# Altium PCB Pulser Driver.PcbDoc (part 2 of 3)
Units mil, origin at the board's own origin, x right, y up, seen from the top; angles counter-clockwise.
Board outline 1200 x 10020 mil, 6 copper layers (TopLayer, Ground, MidLayer1, MidLayer2, Power, BottomLayer); 260 components, 152 nets, 836 pads, 245 vias.
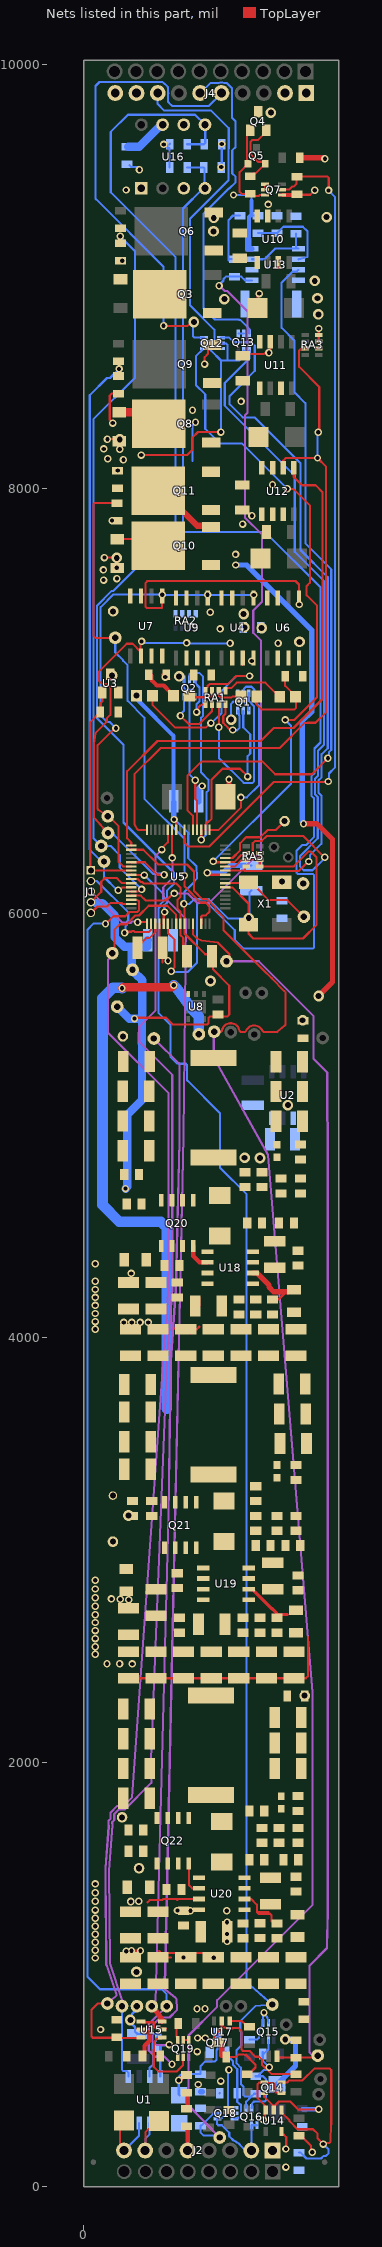
[diagram p6: the nets of this part, all layers, seen from the top]

## Via types
v1: diameter 35, hole 20, TopLayer to BottomLayer, 210 vias
v2: diameter 50, hole 28, TopLayer to BottomLayer, 35 vias

## Nets (pads, with @x,y where several pads share a name; then routed paths per layer and width w, separated by ;. In a path a pad name is that pad's centre, name@x,y a point inside that pad or via, vN(x,y) a via of type N, cw(c..) or ccw(c..) an arc to the next point about the centre after c; other vN are vias at no path point) (continued)
3: C19.1 J4.9 Q10.3 Q11.2 R10.1 U12.6 | length 345.9
  TopLayer w10: R10.1@158,8085.68 158.32,8086 v1(160,8086) R10.1@165,8081 ; Q11.2@350.97,7990.76 Q11.2@350.97,8004.71
  TopLayer w30: Q11.2@350.97,7990.76 450.14,7891.59 468.41,7891.59 533.95,7826.05 Q10.3@593.48,7826.05
  BottomLayer w10: J4.9@233,9860 J4.9@245,9860
3H: U5.1 U12.1 | length 2602.5
  TopLayer w10: U5.1@223.31,6319.17 223.31,6333.69 204,6353 204,6669.07 346.93,6812 833,6812 894,6873 988,6873 1124.5,7009.5 1124.5,7984.5 1092,8017 1028,8017 989,8056 U12.1@989,8099
3L: RA3.3 U5.64 U12.2 | length 3333
  TopLayer w10: U5.64@297.21,6393.07 296.89,6393.07 255.52,6393.07 252.59,6396 251.84,6396.75 238,6418.21 238,6654.99 361.01,6778 922,6778 1041,6897 1052.46,6897 1052.96,6897.5 1091.5,6897.5 1141.5,6947.5 1141.5,8104.81 v1(1101,8145.31) 951.31,8145.31 939,8133 U12.2@939,8099 ; RA3.3@1044,8662.5 1039.16,8657.66 1020.14,8657.66 1014.28,8651.8 1014.28,8574.73 1109.35,8479.66 1109.35,8271.35 v1(1105,8267)
  BottomLayer w10: v1(1101,8145.31) 1101,8263 v1(1105,8267)
3V3: 1.1 C1.1 C4.2 C5.2 C6.2 C7.2 C8.2 C9.2 C10.2 C12.2 C13.2 C14.2 D3.1 D4.1 D5.1 D6.1 J1.4 pad.28 pad.45 Q12.2 Q12.5 Q13.5 Q15.5 Q16.5 R1.2 R17.2 R22.1 R24.2 R26.1 R45.2 R74.2 R75.1 RA2.1 RA2.3 RA2.5 RA2.7 RA5.3 RA5.5 RA5.7 U1.3 U3.2 U4.3 U4.7 U4.8 U5.10 U5.19 U5.26 U5.38 U5.57 U6.3 U6.7 U6.8 U7.3 U7.7 U7.8 U9.3 U9.7 U9.8 U13.8 U15.1 U15.5 U17.1 U17.5 X1.4 | length 9890.7
  TopLayer w10: J1.4@33,6052 82,6101 82,6148.42 99.58,6166 154.51,6166 172.15,6148.36 172.15,6147.87 178.01,6142.01 U5.10@223.31,6142.01 ; U3.2@161.4,7040.39 U3.2@163.02,7042 ; D6.1@231.2,7042 D6.1@248.2,7025 ; v1(238.72,5503.62) 242.61,5507.5 387.5,5507.5 419.96,5475.04 580.13,5475.04 587.15,5482.07 587.15,5507.14 593.01,5513 633.09,5513 675,5513 685,5523 685,5659 609.29,5734.71 609.29,5791.76 C5.2@604.06,5797 594.33,5806.72 572.28,5806.72 474.37,5904.63 U5.26@474.37,5950 474.06,5950.32 474.06,6042.43 v1(471.49,6044.99) ; pad.28@250,850 pad.28@257,843 ; C6.2@252.94,5838 261,5838 264,5835 264,5853.11 294,5883.11 308.11,5883.11 336.26,5911.26 336.26,5930.31 336.58,5930.63 U5.19@336.58,5950 ; U15.1@270,777.4 273.31,774.09 330,774.09 333,771.09 333,758.5 ; v1(270,8159) 486,8159 510,8183 510,8240 538,8268 645.28,8268 v1(645.78,8267.5) ; C13.2@319,7101 323,7097 ; 333,751 340.6,743.4 U15.5@369.41,743.4 ; U15.5@369.41,740 374.25,744.84 U15.5@386.84,744.84 ; v1(425,6442) 425,6435.24 434.68,6425.55 434.68,6393.39 U5.57@435,6393.07 ; U17.1@612.6,683.16 612.6,708.85 649.75,746 650,746.25 U17.5@650,779.41 ; 650,750 668.84,750 672.59,746.25 702.22,746.25 703.97,748 727,748 742,733 742,678 742.41,677.59 742.41,646.62 750.03,639 781,639 808,612 826,612 840,598 840,573.03 859.03,554 v1@864,554 ; U5.38@666.38,6122.32 666.69,6122.01 699.99,6122.01 776,6046 776,5946.27 775.62,5945.9 775.62,5904.38 799,5881 1032.4,5881 1097,5945.6 1097,6263 1068.12,6291.88 1059.84,6291.88 988.97,6221.01 RA5.7@829,6221.01 RA5.5@829,6252.5 RA5.3@829,6284 ; U4.3@749,7170 U4.3@749,7203 ; D4.1@814.8,7021 814.8,6983.2 837,6961 993.14,6961 999,6966.86 999,7018.8 D3.1@997.8,7020 997.8,7021.97 948.32,7071.45 C12.2@948.32,7117 ; v1@863,553 863,552 885,530 R22.1@1000,530 ; C12.2@946,7117 C12.2@947.16,7115.84
  TopLayer w20: v2(248,7026) D6.1@248.6,7026.6 ; D6.1@248.6,7031.6 D6.1@248.6,7026.6 ; D6.1@250,7028 D6.1@248.6,7026.6 ; C13.2@318.5,7119.28 318.5,7098.5 344,7073 376.28,7073 406.72,7042.56 407.61,7042.56 423.2,7026.97 D5.1@423.2,7025
  MidLayer1 w10: pad.45@169.89,5571.97 169.89,5567.85 172.6,5564.96 pad.45@157,5560 180.94,5555.77 180.01,5554.85 pad.45@179.04,5553.88 ; pad.28@241.28,855.86 247.14,850 pad.28@250,850
  BottomLayer w10: J1.4@33,6052 37.75,6047.25 57.75,6047.25 ; v2(248,7026) 248,7015.18 258.78,7004.39 258.78,7000.22 ; pad.28@250,850 240.65,840.65 240.65,827.12 226.65,813.12 226.65,792.65 v2(219,785) 219,774.18 241,752.18 241,731 252.94,719.06 350.94,719.06 360,710 352,710 340,698 340,688 333,681 330.03,681 323,673.97 323,628.03 327,624.03 327,575.19 318.12,566.31 316.31,566.31 310,560 U1.3@310,519 ; v1(425,6442) 429,6442 492,6379 492,6260 528.15,6223.85 530.84,6221.16 533.77,6170.16 533.77,6165.73 521.49,6153.44 521.49,6148.49 474.37,6101.37 474.37,6047.87 v1(471.49,6044.99) 471.98,6044.5 497.94,6044.5 519.44,6066 588.76,6066 679.76,5975 775,5975 v2(777,5977) ; Q12.2@565.29,8687 588,8687 598,8677 598,8653 646,8605 ; v1(645.78,8267.5) 646,8267.72 646,8605 ; Q12.5@646,8687 648.65,8684.35 671.14,8684.35 677,8678.5 677,8606 678,8605 ; Q13.5@753.59,8651 753.59,8627.59 731,8605 678,8605 ; v2@780,5990 780,6097.89 C7.2@789,6106.89 ; Q16.5@790,370 792.87,372.87 792.87,391.87 801.7,400.7 852.14,400.7 858,406.56 858,506 844,520 R26.1@826,520 ; R26.1@810,520 R26.1@826,520 ; R24.2@843,632.87 R24.2@843,625 843,593 v1(874,562) ; R24.2@845.06,622.94 870,647.87 Q15.5@870,690 ; 859.22,549.22 847.09,549.22 826,528.13 R26.1@826,520 ; 646,8605 678,8605
  BottomLayer w20: 258.78,7000.22 422.94,6836.06 C8.2@422.94,6524
  BottomLayer w25: C8.2@422.94,6524 423.97,6522.97 423.97,6443.03 v1(425,6442)
  BottomLayer w40: 57.75,6047.25 87.75,6047.25 146.5,5988.5 146.5,5886.5 191,5842 225,5842 ; pad.45@157,5560 213.17,5503.83 238.72,5503.83 274,5503.83 274,5434.61 273,5433.61 273,5386.39 274,5385.39 274,5120.03 204,5050.03 204,4710.38 v1(196.33,4702.71) ; v1(238.72,5503.62) v1@238.93,5503.83 ; 276,5519.5 276,5684.43 264.28,5696.14 256.4,5704.03 254.64,5704.25 243.18,5715.71 pad.28@229,5734 225.17,5737.83 225.17,5751.97 225,5752.14 225,5842 ; C4.2@299.31,5842 289,5842 225,5842 ; C4.2@299.31,5844.64 299.31,5870.36 C4.2@301.94,5873
  other v1: 536,700 572,700 596,7418 199,9408
  other v2: 248,1012 756,7347 753,7410 1088,8980
3V3_VDD: C26.2 C27.2 C28.2 C29.2 C30.2 C31.2 C32.2 C33.2 C34.2 C35.1 C36.1 C48.2 C49.2 C50.2 C51.2 C52.2 C53.2 C54.2 C55.2 C56.2 C57.1 C58.1 C70.2 C71.2 C72.2 C73.2 C74.2 C75.2 C76.2 C77.2 C78.2 C79.1 C80.1 F2.2 F3.2 J2.1 J4.1 R42.2 R52.2 R62.2 Rs1.2 Rs2.2 Rs3.2 U18.8 U19.8 U20.8 | length 730.9
  TopLayer w10: v1(97.02,7676.09) v2@152,7676.09 ; v1(111.02,8234.09) F2.2@166,8234.09 ; C34.2@201,4260 C34.2@210,4260 ; C71.2@220,1080 247.5,1080 224.53,1102.97 v1(224.53,1110.88) ; v1@226.18,1111 v1@251.68,1111 ; v1(267,1111) v1@266.75,1110.75 ; C72.2@350,1080 410,1080 ; 355,1110 365,1100 590,1100 C74.2@610,1080 ; 428,4044 C29.2@480,4040 492,4040 C29.2@500,4040 ; C29.2@500,4020 C29.2@500,4040 ; 545,4053 532,4040 C29.2@500,4040 ; C35.1@545,4150 C35.1@545,4189 ; v1@266.75,1110.75 270,1107.5 v1@266.75,1110.75
  other v1: 533,838 571,838 53.5,1077 612,1078 469,1080 200.04,1109.34 53.5,1113 53.5,1151 675,1155 53.5,1189 674,1190 53.5,1227 675,1246 53.5,1264 502,1300 673,1300 441,1301 53.5,1303 221.48,1341.67 53.5,1344 221.62,1343.67 259,1345 53.5,1385 53.5,1426 227.5,2463 109,2464 168.5,2464 53.5,2508 53.5,2544 53.5,2582 53.5,2620 53.5,2658 53.5,2695 53.5,2734 212,2765 171,2767 130,2769 53.5,2775 53.5,2816 53.5,2857 53.5,4040 188,4072 226,4072 265,4072 304,4072 53.5,4076 53.5,4114 53.5,4152 53.5,4190 53.5,4227 53.5,4266 223,4303 53.5,4348 93,7570 156,7577 92,7618 155.02,7628.09 186.5,8137 112.02,8142.09 169.02,8186.09 94,8188
  other v2: 155,7675 169,8233
3V3FB: C42.1 R46.1 R48.2 R49.1 R51.2 U18.4
3V3GDRV: Q20.4 U18.6 | length 127.9
  TopLayer w21: Q20.4@515,4432.75 515,4385 545,4355 U18.6@582.75,4355
3V3GND: 2.1 C26.1 C27.1 C28.1 C29.1 C30.1 C31.1 C32.1 C33.1 C34.1 C36.2 C37.1 C38.1 C41.2 C43.1 C44.1 C45.1 C46.1 C98.1 C99.1 C100.1 D12.A R15.1 R44.1 R47.1 R51.1 U18.5
3V3ISNS: C35.2 R43.1 U18.7
3V3OutPSU: C41.1 C43.2 C44.2 C45.2 C46.2 C47.1 C98.2 C99.2 C100.2 L1.2 R45.1 R50.1
3V3RC: C37.2 R42.1 U18.1
5V: 3.1 C2.2 C23.2 pad.35 Q4.3 Q17.2 R19.1 R20.1 R32.1 R55.2 U2.2 U14.5 U15.6 U16.6 U16.7 | length 5015.2
  TopLayer w10: U16.6@468.17,9718.83 U16.6@471,9716 ; U14.5@932.24,249.03 936.84,244.43 942,244.43 953.5,232.93 953.5,172.5 952,174 v1(952,177)
  TopLayer w25: pad.35@320,850 322.74,849.5 327.32,844.92 328.91,843.34 364.95,791.44 369.41,785.01 369.42,777.48 U15.6@369.41,777.4
  MidLayer1 w10: pad.35@320,850 334.06,863.32 334.16,863.41 337.07,866.33 399,3160.7 409.39,3889.73 433.29,4223.13 451.28,4927.12 451.28,5288.72 pad.35@330,5410
  BottomLayer w10: R32.1@640,440 R32.1@641.5,441.5
  BottomLayer w40: C23.2@208.59,9611 260.59,9611 365.59,9716 v1(371,9716)
  other v1: 952,92 644.5,497 534,636
  other v2: 210.12,3162 830,4847 758,4848 881,9773
5V-MEAS: Q19.2 U15.4 | length 362.5
  TopLayer w10: U15.4@369.41,702.6 364.57,697.76 345.76,697.76 331,683 331,648.28 329.28,646.56 329.28,564.72 351,543 439,543 467,571 467,608.29 Q19.2@468,609.29
5V-Q-EN: Q14.3 R19.2 U14.1 | length 1130.1
  TopLayer w10: Q14.3@930.71,491.18 959.54,491.18 968.64,500.28 1030.56,500.28 1086.28,556 1159.14,556 1166,549.14 1166,293.13 1165,292.13 1164.89,288.88 1162.57,217.67 1162.25,210.64 1156.39,204.78 1152.47,204.78 1132.78,204.78 v1(1128,200) 1101.59,226.41 1101.59,248.41 1079.96,270.04 1006.68,270.04 969.39,307.33 969.39,311.29 U14.1@932.08,348.6
  BottomLayer w10: R19.2@1013.87,160 1021.75,160 1049.25,132.5 1117.57,132.5 1129.75,144.68 1141.32,144.68 1153.5,156.86 1153.5,174.5 v1(1128,200)
5V-Q-TX: Q14.6 U14.2 | length 395.1
  TopLayer w10: Q14.6@850,440 850.02,422.98 U14.2@894.6,378.4 ; U14.2@895.84,377.16 919.68,401 971.96,401 1008.96,364 v1(1107,364)
  BottomLayer w10: 1029,365.68 1030.68,364
  BottomLayer w20: 1030.68,364 v1(1107,364)
5vFB: C64.1 R56.1 R58.2 R59.1 R61.2 U19.4
5VGDRV: Q21.4 U19.6
5VGND: 4.1 C48.1 C49.1 C50.1 C51.1 C52.1 C53.1 C54.1 C55.1 C56.1 C58.2 C59.1 C60.1 C63.2 C65.1 C66.1 C67.1 C68.1 C95.1 C96.1 C97.1 D13.A R14.1 R54.1 R57.1 R61.1 U19.5 | length 1044.1
  TopLayer w10: C48.1@210,2395 C49.1@340,2395 C50.1@470,2395 C51.1@600,2395 C52.1@730,2395 C53.1@860,2395 C54.1@990,2395 1022,2395 1046,2395 1056,2405 1056,2429 1056,2589 ; C59.1@820,2610 C59.1@830,2610
5VISNS: C57.2 R53.1 U19.7
5VOutPSU: C63.1 C65.2 C66.2 C67.2 C68.2 C69.1 C95.2 C96.2 C97.2 L2.2 R55.1 R60.1
5VRC: C59.2 R52.1 U19.1
12V: 5.1 C16.2 C18.2 C20.2 D7.1 D8.1 D9.1 pad.42 R65.2 U10.5 U11.5 U12.5 | length 5450.6
  TopLayer w10: D7.1@818,8852 818,8912 v1(826,8920) ; v2@1103.49,5612.51 v2(1106,5610)
  TopLayer w15: pad.42@542,5419.7 pad.42@542,5430
  TopLayer w25: v1(1035,6422) 1099,6422 1172,6349 1172,5676 1108.51,5612.51 v2@1103.49,5612.51
  TopLayer w40: v1(179.77,5647.23) 183.54,5651 414.68,5651 v1(424,5660.32)
  BottomLayer w10: 512.5,8131 512.5,8300.5 v1(526,8314) ; v1(741,8412) v1@745.78,8416.78 ; v1(826,8920) v1@833.24,8912.76
  BottomLayer w25: v1(716,7641) 767,7641 1073.5,7334.5 1073.5,6949.27 1029,6904.77 1029,6430.71 1035,6424.71 v1(1035,6422)
  BottomLayer w50: v1(179.77,5647.23) 178.71,5648.29 137.29,5648.29 88,5599 88,4626 167,4547 361.71,4547 391,4517.71 391,3666.5 ; v1(424,5660.32) 438.19,5646.13 512.71,5543.79 542,5514.5 pad.42@542,5430
  other v1: 715,7691 747.78,7833.78 792,7873 512,8370
12VFB: C86.1 R66.1 R68.2 R69.1 R71.2 U20.4
12VGDRV: Q22.4 U20.6 | length 156.1
  TopLayer w10: Q22.4@495,1522.75 495,1421 511,1405 U20.6@542.75,1405
12VGND: 6.1 C70.1 C71.1 C72.1 C73.1 C74.1 C75.1 C76.1 C77.1 C78.1 C80.2 C81.1 C82.1 C85.2 C87.1 C88.1 C89.1 C90.1 C92.1 C93.1 C94.1 D14.A R16.1 R64.1 R67.1 R71.1 U20.5
12VISNS: C79.2 R63.1 U20.7 | length 256
  TopLayer w10: 300,1340 310,1350 370,1350 375,1355 445,1355 ; 440,1350 445,1355 ; U20.7@542.75,1355 445,1355
12VOutPSU: C85.1 C87.2 C88.2 C89.2 C90.2 C91.1 C92.2 C93.2 C94.2 L3.2 R65.1 R70.1
12VRC: C81.2 R62.1 U20.1
AX: C25.2 R38.1 U5.21 U16.5 | length 4858.7
  TopLayer w10: U5.21@375.95,5950 376.26,5950.32 376.26,6001.76 v1(380.5,6006)
  BottomLayer w10: v1(380.5,6006) 379.04,6007.46 379.04,6037.5 391,6049.46 391,6105.72 425,6139.72 425,6190 187,6428 187,6794.28 62,6919.28 62,7449.04 131.96,7519 139.72,7519 431,7810.28 431,9093 127,9397 127,9682 208,9763 524,9763 572,9715 572,9629 R38.1@567,9624 C25.2@487,9624
AY: C24.2 R37.1 U5.22 U16.4 | length 5773
  TopLayer w10: U5.22@395.63,5950 395.63,5907.37 428,5875 428,5745.18 412.23,5729.41 v1(412.23,5726.82)
  BottomLayer w10: v1(412.23,5726.82) 416.05,5723 489,5723 533,5767 533,6043.14 538.86,6049 581.72,6049 710.84,5919.88 710.84,5875.31 753,5833.16 1079.3,5833.16 1085.16,5839.01 1085.16,6179.64 1079.3,6185.5 1007.86,6185.5 1002,6191.36 1002,6295 1029,6322 1047.28,6322 1085.14,6359.86 1085.14,6541.06 1072,6554.2 1072,6645.55 1086.5,6660.05 1086.5,6776.5 1115,6805 1115,7536.42 855.42,7796 472.86,7796 467,7801.86 467,9321 562,9416 U16.4@571,9416 569,9418 569,9509.32 R37.1@564.32,9514 C24.2@487,9514
BAT-M: pad.27 Q19.1 R36.2 U5.14 | length 6145.1
  TopLayer w10: v1(102,5951) 104,5951 139,5986 195,5986 215,6006 235.24,6006 235.82,6006.58 252.96,6006.58 260,6013.62 260,6055.27 252,6063.27 U5.14@223.31,6063.27
  MidLayer1 w10: pad.27@390,850 306,766 306,641 335.24,611.76 380.3,611.76 v1(415.51,576.55)
  BottomLayer w10: v1(102,5951) 45,5951 17,5923 17,989 76,930 367,930 390,907 pad.27@390,850 pad.27@395,850
CANH: D1.2 J2.8 U1.7 | length 324.1
  TopLayer w10: J2.8@171,160 171,296.77 D1.2@191,316.77
  BottomLayer w10: J2.8@190,170 260,240 U1.7@260,300
CANL: D2.2 J2.7 U1.6 | length 324.1
  TopLayer w10: J2.7@290,170 290,256.77 D2.2@360,326.77
  BottomLayer w10: J2.7@290,170 290,226 310,246 U1.6@310,300
CANRX: R1.1 U1.4 U5.58 | length 6144.6
  TopLayer w10: U5.58@415.32,6393.07 415.5,6392.89 415.5,6262.5 v1(417,6261)
  MidLayer1 w10: v1(402,669) 400.5,667.5 341.5,667.5 323,686 323,758.96 360.52,796.48 403.48,796.48 438.34,831.34 438.34,835.75 435.74,884.64 432.66,887.73 432.24,888.06 382.47,928.25 381.33,929.81 381.33,938.09 469.08,4951.37 480.74,5964.56 480.74,5972.85 479.83,5973.76 374,6079.59 374,6122 417,6165 v1(417,6261)
  BottomLayer w10: U1.4@360,519 360,662 362,664 390.24,664 395.24,669 v1(402,669)
CANTX: pad.26 U1.1 U5.59 | length 6123.5
  TopLayer w10: v1(366.94,6300.06) 366.94,6305.94 395.63,6334.63 U5.59@395.63,6393.07
  MidLayer1 w10: pad.26@180,850 180,878.52 122.82,1050.37 122.57,1052.49 122.5,1059.3 118.17,1488.06 118.17,1488.11 cw(c128.17,1488.16) 118.17,1488.16 118.17,1488.54 134.81,1703.88 134.84,1704.27 134.84,1708.8 133.66,1709.97 133.66,1713.49 133.66,1717.64 143,1726.97 143,1755.33 164.67,1777 193.03,1777 318.31,1902.28 318.31,1906.79 314.84,1954.45 314.81,1954.81 314.81,1955.17 392.49,3896.87 416.29,4230.17 416.29,5238.71 261,5394 261,5466 338.19,5543.19 338.19,6271.3 v1(366.94,6300.06)
  BottomLayer w10: pad.26@180,850 179,849 179,550.86 184.86,545 202,545 210,537 U1.1@210,519
CLOCK: pad.46 U5.39 X1.3 | length 440.1
  TopLayer w10: U5.39@666.38,6142.01 771.53,6142.01 X1.3@775.52,6146 788.32,6146 815.8,6118.52 815.8,6117.2 871,6062 959,6062 pad.46@1037,5984
DC-: C16.1 C18.1 C20.1 J4.2 Q6.3 Q9.3 Q11.3 R8.1 R9.2 U10.3 U11.3 U12.3 | length 317.2
  TopLayer w10: v1(569,8588) 569,8620 585,8636 585,8677.76 Q9.3@603.03,8677.76 ; Q11.3@590,8080.53 Q11.3@599,8080.53 ; 787.76,8635 847,8635 v1@865,8653 ; v1(872,8641) 879,8648 U11.3@879,8693 U11.3@879,8708 ; v1(889,8020) v1@889,8035 ; J4.2@945,9856.04 J4.2@945,9860
  BottomLayer w10: v1@568,8587 v1(569,8588) ; v1@887.05,8018.05 v1(889,8020) ; J4.2@945,9844 J4.2@945,9860
  other v1: 868.5,9340.38
  other v2: 1105,8822 1101,8898 611,9213 612,9277 1144,9280
F: pad. pad.30 Q18.2 R34.1 U5.2 | length 7485.5
  TopLayer w10: U5.2@223.31,6299.49 280.51,6299.49 350,6230 486,6230 519,6197 519,6105.57 558.07,6066.5 581.26,6066.5 619.88,6027.88 619.88,6017.88 658.5,5979.26 658.5,5923.78 658.5,5919.64 664.36,5913.78 846.07,5732.98 885.16,5693.88 945.07,5633.07 950.93,5627.21 950.93,5623.07 950.93,5475.93 947.76,5472.76 911.69,5441.41 907.95,5441.41 849.92,5441.41 847.43,5441.41 845.24,5442.57 cw(c849.92,5451.41) 840.92,5447.06 ccw(c803,5429) 764.43,5445.61 760.22,5441.4 756.07,5441.4 742.73,5441.4 738.59,5441.4 735.66,5444.33 733.49,5446.5 ccw(c692,5440) 650.51,5446.5 648.34,5444.33 645.41,5441.4 641.27,5441.4 622.91,5441.4 622.56,5441.4 622.21,5441.43 pad.30@614,5442
  MidLayer1 w10: pad.30@614,5442 612,5440 612,5322.97 612,5320.37 613.26,5318.1 867,4862.33 1077,2328.33 1078.07,1336.36 1078.07,1328.07 628,878 628,846.78 493,711.78 493,382 pad.@640,231
  BottomLayer w10: Q18.2@629.29,345.59 611.34,345.59 553.07,287.32 R34.1@550,287.32 550,254 563,241 pad.@639,241
FLOW: J2.5 R31.2 | length 117.3
  TopLayer w20: J2.5@490,170 R31.2@490,287.32
FP: R30.2 R31.1 | length 80
  TopLayer w20: R31.1@490,370 R30.2@490,450
FP2: D11.2 Q17.3 R30.1 R33.1 | length 497.6
  TopLayer w10: v1(446.95,501.19) v1@450.31,501.19 ; R30.1@478.13,529 R30.1@486,529
  TopLayer w20: v1@450.31,501.19 R30.1@478.13,529
  BottomLayer w10: D11.2@450,430 446.95,433.05 446.95,504.86 451.74,509.65 451.74,522.24 459.49,530 R33.1@550,530 550,542.72 550,568 572,590 617.97,590 625,597.03 625,615.03 625,643 630,648 Q17.3@630,720
GATE-H: Q4.1 Q5.1 Q7.6 R3.1 | length 445.6
  TopLayer w10: Q4.1@784,9690 784,9682 783.87,9682 768,9666.13 768,9561 769.56,9559.44 769.56,9536.88 Q5.1@773.65,9532.8 773.65,9531.3 734,9491.65 734,9400 744,9390 R3.1@784,9390 794,9380 824,9380 828.41,9384.41 Q7.6@854,9384.41
GND: C2.1 C3.1 C4.1 C5.1 C6.1 C7.1 C8.1 C9.1 C10.1 C11.2 C12.1 C13.1 C14.1 C21.1 C22.2 C23.1 C24.1 C25.1 D10.1 D11.1 J1.5 J2.2 J4.10 pad.47 Q1.1 Q1.4 Q2.1 Q2.4 Q7.1 Q14.1 Q14.4 Q15.1 Q15.2 Q16.1 Q16.2 Q18.1 R4.1 R5.2 R7.1 R9.1 R11.1 R13.1 R14.2 R15.2 R16.2 R18.2 R23.2 R25.2 R29.2 R33.2 R34.2 R36.1 R37.2 R38.2 R41.2 R72.2 R73.2 R76.2 RA3.4 RA3.6 RA3.8 U2.4 U3.3 U4.4 U5.9 U5.15 U5.20 U5.25 U5.41 U6.4 U7.4 U8.3 U9.4 U13.4 U14.3 U15.2 U16.1 U16.3 U17.2 X1.2 | length 5427.6
  TopLayer w10: J1.5@33,6002 34,6002 64,6032 109,6032 125,6048 ; 125,6047.89 179,6047.89 183.31,6043.58 U5.15@223.31,6043.58 ; v1(136,8310) 122,8324 122,8439 132,8449 R7.1@164,8449 ; R4.1@172,9074.32 172.68,9075 v1(181,9075) ; U5.9@223.31,6161.69 223.62,6161.38 253.18,6161.38 267.33,6147.23 275.77,6147.23 283,6140 436,6140 455.35,6120.65 455.35,6077.51 441.99,6064.15 441.99,6021.01 454.69,6008.31 454.69,5897.67 468.31,5884.05 468.31,5845.15 485.94,5827.51 485.94,5766.49 C5.1@503.58,5748.85 ; U15.2@253.84,741.58 U15.2@270,740 U15.2@286.32,740 ; R36.1@286.32,617 R36.1@286.32,624.87 ; U5.20@356.26,5950 356.26,5852.8 C6.1@371.06,5838 371.06,5769.08 370.51,5768.54 ; 369,7124 C13.1@389,7124 389,7116.13 401.72,7103.41 C13.1@403.59,7103.41 ; v2@576.35,5688.65 589.35,5688.65 v2(597,5681) ; v1(581.41,6190.93) 585.83,6190.93 595.39,6181.38 U5.41@666.38,6181.38 ; C22.2@670,610 715.81,610 727.81,622 761.62,622 809,574.62 809,561.13 777.87,530 C21.1@770,530 ; R29.2@676.25,362 R29.2@681,362 ; v1(846.13,314) 846.13,320.76 852.35,326.99 852.35,355.16 U14.3@857.2,360 ; Q14.4@850,491.18 828,491.18 819,482.18 819,416 852.6,382.4 U14.3@852.6,360 ; Q14.4@860.83,488.31 891.84,488.31 897.7,482.45 897.7,459.89 897.7,448.73 903.56,442.87 Q14.1@927.83,442.87 ; R72.2@1004,9387.32 1005.32,9386 1067,9386 v1(1088,9407) ; R23.2@1018.87,243.32 1071.22,190.98 1071.22,166.78 v1(1076,162) ; v1(1106.78,8755.5) 1106.78,8725.71 RA3.8@1106.99,8725.5 RA3.6@1106.99,8694 RA3.4@1106.99,8662.5
  TopLayer w20: R36.1@286.32,624.87 286.32,663.87 308.16,685.71 308.16,719.48 298.2,729.44 296.88,729.44 U15.2@286.32,740 ; Q7.1@934.71,9384.41 935.42,9385.13 960.45,9385.13 1001.81,9385.13 R72.2@1004,9387.32
  TopLayer w25: v1(132.5,7850.32) R13.1@157,7850.32 ; 650,618 U17.2@650,680 ; C11.2@667.97,6549 683.97,6565 v1(683.97,6630.56) ; R5.2@1016.68,9560 1129.29,9560 1133.29,9556 v1(1136,9556)
  BottomLayer w10: C23.1@215.5,9526.5 215.5,9524.7 223.59,9516.61 251.39,9516.61 262,9506 v1(262,9504) ; v1(376,9623) 391.61,9623 393.6,9621.01 393.6,9605.4 402.33,9605.4 404.32,9603.41 C24.1@404.32,9514 ; C25.1@404.32,9624 404.32,9624.32 C25.1@406,9626 ; Q2.4@471.87,7101 471.87,7060.13 477,7055 513.05,7055 523.05,7045 Q2.1@523.05,7020.29 ; R33.2@550,438 R33.2@550,447.32 ; v1@551.71,6599.65 v1(557.06,6599.65) ; v1(647,9516) R37.2@647,9514 649.68,9516.68 R38.2@649.68,9624 649.68,9624.68 v1(650,9625) ; v1(683.5,550.93) 679.3,546.72 679.3,352.05 650.12,322.87 632.17,322.87 Q18.1@629.29,320 627.19,317.13 627.19,295.02 633.2,289.01 650.17,289.01 685.23,253.96 685.23,239.41 ccw(c695.04,241.31) 687.91,234.3 705.07,217.15 706.46,216.32 cw(c689,170) 720.85,207.89 720.92,207.84 ccw(c727.21,215.61) 722.05,207.04 722.1,207.01 729.22,202.78 735.08,196.92 756,176 784,176 786.93,173.07 790,170 Q16.2@790,289 ; v2(693.82,6912.53) 693.82,6986.82 705,6998 752.95,6998 774.13,6976.83 774.13,6958.87 Q1.4@777,6956 ; v1(705,9384.5) 705.75,9383.75 786,9383.75 790,9379.75 790,9358 ; Q1.1@725.82,7036.71 Q1.1@728.69,7033.83 ; C7.1@758.49,6225 C7.1@789,6225 ; 766,9205 773,9212 ; 777.59,9277 777.59,9280.59 ; R25.2@780,692.68 816.68,692.68 824.54,700.54 824.54,736.01 841.54,757.01 Q15.1@844.41,770.71 844.92,771.22 844.92,815.95 v1(848.95,819.98) ; 784.68,9287.68 790,9287.68 R18.2@821,9287.68 ; Q16.2@790,289.29 Q16.2@790,289 ; Q16.1@815.59,289.29 815.59,289 Q16.2@790,289 ; v1@850,821 850,812.31 854.44,807.87 860.17,802.14 865.28,794.79 867.01,785.65 867.92,780.81 868.3,778.82 Q15.2@870,770.71
  BottomLayer w20: 777.59,9277 777.59,9247.15 778.41,9246.33 778.41,9180.24 780,9178.65 U13.4@780,9132 ; 777.59,9280.59 784.68,9287.68 ; 790,9287.68 790,9358
  BottomLayer w25: C8.1@541.06,6524 541.06,6589 v1@551.71,6599.65 ; R33.2@550,447.32 R33.2@557.87,447.32 ; v1(581.41,6190.93) 583.32,6189.02 631.37,6189.02 632.39,6188 653.1,6188 690.1,6225 C7.1@758.49,6225 ; R11.1@735,9205 766,9205 ; 773,9212 773,9132 780,9132 U13.4@792,9132 ; D10.1@910,481.1 997,568.1 997,682.5 989.5,690 ; v2(949,694) 971,694 975,690
  other v1: 539,481 79,740 396.51,5776.54 383.02,7113.09 791.5,7188.86 642,7340
  other v2: 1040,2313 961,5096 1031,5496 933,6149 449,7116 133.34,7120.34 1016,7279 838,7344 662,8894
H1#: Q12.4 RA5.8 U5.42 | length 3368.6
  TopLayer w10: U5.42@666.38,6201.06 732.94,6201.06 758.13,6199 ; RA5.8@766.01,6221.01 758.13,6221.01 758.13,6199 ; v1(1060,6244) 1058,6244 1013,6199 758.13,6199
  BottomLayer w10: Q12.4@646,8712.59 684.41,8712.59 706,8691 789,8691 805,8675 805,8555.64 687,8437.64 687,8398 748,8337 804,8337 1021,8120 1021,7712 1149,7584 1149,6777.65 1120.5,6749.15 1120.5,6640.83 1106,6626.33 1106,6568.28 1119.14,6555.14 1119.14,6327.14 1064.78,6272.78 1064.78,6248.78 v1(1060,6244)
H2#: Q13.4 RA5.6 U5.43 | length 3491.5
  TopLayer w10: U5.43@666.38,6220.75 712.75,6220.75 744.5,6252.5 RA5.6@766.01,6252.5 788,6252.5 796,6260.5 796,6330 807,6341 839,6341 862,6364 1033,6364 1133,6264 v1(1135,6264)
  BottomLayer w10: Q13.4@779.18,8651 779.18,8614.18 664,8499 664,8392 994,8062 994,7703.27 1132,7565.27 1132,6795.15 1103.5,6766.65 1103.5,6647.87 1089,6633.37 1089,6561.24 1102.14,6548.1 1102.14,6352.81 1019,6269.67 1019,6219.78 1036.28,6202.5 1077.5,6202.5 1135,6260 v1(1135,6264)
H3#: Q12.1 RA5.4 U5.44 | length 3179.4
  TopLayer w10: v1@617,6248.54 625.11,6240.43 U5.44@666.38,6240.43 666.69,6240.75 708.71,6240.75 742.3,6274.35 748.48,6274.35 758.13,6284 RA5.4@766.01,6284 ; v1(949,6911) 991.23,6911 1099,7018.77 1099,7448.73 1049.5,7498.23 1049.5,7542 1065,7557.5 1065,7922 987,8000 v1(958,8000)
  BottomLayer w10: Q12.1@565.29,8661.41 528,8624.12 528,8489 572,8445 572,8283 641,8214 744,8214 v1(958,8000) ; v1(609.5,6244.44) 976,6610.94 976,6884 v1(949,6911)
HA: Q3.1 U10.7
HALL-1: J4.5 Q12.3 | length 2248.2
  TopLayer w10: v1(375.5,8768) 489.18,8768 509.18,8788 v2@522,8788
  BottomLayer w10: v1(375.5,8768) 375.5,9046.65 57.93,9364.22 55,9367.15 55,9898 74,9917 366.19,9917 369.34,9917 cw(c284.19,9792.47) 390,9900 cw(c347.26,9856.57) 394.82,9894.66 cw(c387,9888.43) 395.01,9894.41 397,9891.77 397,9888.43 397,9872.02 cw(c348,9865) 397,9857.98 397,9823 399.93,9820.07 416,9804 589,9804 J4.5@645,9860 ; v2(518,8786) 514,8782 514,8718.45 519.86,8712.59 Q12.3@565.29,8712.59
HALL-2: J4.6 Q13.3 | length 1583.5
  BottomLayer w10: J4.6@545,9860 598,9913 635.91,9913 cw(c648,9865) 660.09,9913 673,9913 675.93,9910.07 698,9888 698,9748.04 715,9731.04 715,9610.97 699,9594.97 699,9486.03 715,9470.03 715,9445 685,9415 683.03,9415 564,9295.97 564,8852 618,8798 730.38,8798 732.38,8796.01 736.99,8796.01 779.18,8753.82 Q13.3@779.18,8731.71
HALL-3: J4.8 Q12.6 | length 1614
  BottomLayer w10: J4.8@345,9860 347.64,9857.36 347.64,9813.36 379,9782 600,9782 683,9699 683,9603.01 682,9602.01 682,9455 501,9274 501,8864 615,8750 615,8674.45 625.17,8664.28 643.13,8664.28 Q12.6@646,8661.41
HALL-EN: Q7.2 R72.1 U5.55 | length 4008.7
  TopLayer w10: U5.55@474.37,6393.07 474.37,6331.63 492.2,6313.8 589.84,6313.8 893.74,6617.69 1148.69,6617.69 v1(1152,6621) ; Q7.2@934.71,9410 966.4,9410 980.54,9424.14 989.14,9424.14 1002,9437 1002,9468 1005,9471 1148.14,9471 1154,9465.14 1154,9407 v1(1153,9406)
  BottomLayer w10: v1(1152,6621) 1155.5,6624.5 1155.5,6658.5 1183,6686 1183,9376 v1(1153,9406)
HB: Q8.1 U11.7
HC: Q10.1 U12.7
IG: R11.2 R12.1 U13.2 | length 282.8
  BottomLayer w10: 681.34,9075.85 681.34,9266.34 702.68,9287.68 708,9287.68 ; 684,9082.68 R12.1@710,9082.68 ; 705.34,9285.02 708,9287.68 ; R11.2@735,9287.68 708,9287.68
IL-A: R12.2 U5.13 U13.1 | length 3738.9
  TopLayer w10: U5.13@223.31,6082.95 268.05,6082.95 291,6060 387,6060 420.5,6093.5 v1(425.85,6093.5)
  MidLayer1 w10: v1(425.85,6093.5) 488.74,6093.5 491.67,6090.57 526.74,6055.5 532.74,6049.5 591.41,6049.5 834,6292.09 834,7286 798,7322 798,7427 840,7469 840,7783.28 758.5,7864.78 758.5,8345.3 770.5,8357.3 770.5,8837.83 676.55,8931.77 664.8,8931.77 639.58,8957 v1(637,8957)
  BottomLayer w10: v1(637,8957) 637,8960.52 658.22,8981.74 658.22,8988.81 669.41,9000 R12.2@710,9000 742,9000 760,8982 U13.1@792,8982
IP: R8.2 U13.3 U13.5 | length 316
  BottomLayer w10: U13.3@792,9082 851,9082 901,9132 U13.5@1011,9132 1008,9132 1000,9140 R8.2@1000,9202
LA: Q6.1 U10.4
LB: Q9.1 U11.4
LC: Q11.1 U12.4
LED0: Q1.2 U5.49 | length 888.3
  TopLayer w10: U5.49@592.48,6393.07 635.31,6393.07 740,6497.76 v1(740,6546)
  BottomLayer w10: v1(740,6546) 767.94,6546 825,6603.06 825,6976.96 803,6998.96 803,7054.25 789.84,7067.41 764.16,7067.41 754.28,7057.54 754.28,7039.58 Q1.2@751.41,7036.71
LED1: Q1.5 U5.50 | length 787.3
  TopLayer w10: U5.50@572.8,6393.07 573.11,6393.39 573.11,6416.31 575.17,6418.37 575.17,6422.73 582.19,6429.76 586.76,6429.76 602,6445 602,6630 653,6681 736,6681 771.5,6645.5 v1(771.5,6644.06)
  BottomLayer w10: Q1.5@751,6954 751,6876 784,6843 784,6753.16 771.5,6740.66 v1(771.5,6644.06)
LED2: Q2.5 U5.51 | length 946.4
  TopLayer w10: v1(553.11,6346.61) U5.51@553.11,6393.07
  BottomLayer w10: Q2.5@497.46,7101 497.46,7126.46 504,7133 543,7133 562,7114 562,6931.26 552.37,6921.63 552.37,6663.34 586.56,6629.15 586.56,6577.99 578.72,6570.15 578.72,6372.22 v1(553.11,6346.61)
LED3: Q2.2 U5.52 | length 642.1
  TopLayer w10: v1(525,6627) 525,6539.43 533.43,6531 U5.52@533.43,6393.07
  BottomLayer w10: Q2.2@497.46,7020.29 497.46,6654.54 v1(525,6627)
LTC: pad.38 R40.2 R41.1 U5.28 | length 6000.7
  TopLayer w10: U5.28@513.74,5950 513.74,5901 533.81,5880.93 554.95,5871.44 631.66,5862.15 685.58,5808.23 686.53,5803.72 pad.38@672,5774 ; R40.2@909.06,614.65 909.06,607.32 R41.1@1000,607.32 1091.32,607.32 pad.38@1101,617
  MidLayer1 w10: pad.38@672,5774 824,5774 1083,5515 1083,5313.42 1146.95,5249.47 1146.95,5166.37 1149,4870.17 1149,1302.83 1146.07,1124.07 1063,1041 1063,633.53 1077,619.53 pad.38@1102,617
M\C\L\R\: J1.1 R75.2 U3.1 U5.7 | length 1053.8
  TopLayer w10: U3.1@86.6,7040.39 86.6,6998.28 78.32,6990 R75.2@78.32,6949 30,6900.68 30,6205 J1.1@33,6202 127,6202 127.94,6201.06 U5.7@223.31,6201.06
MEAS-EN: pad.29 R73.1 U5.24 U15.3 | length 6138.2
  TopLayer w10: pad.29@111,862.68 64.68,862.68 36,834 36,706.86 41.86,701 174,701 175,702 177,700 267.4,700 U15.3@270,702.6 ; pad.29@134,5812 143.57,5821.57 143.57,5921.57 170.28,5948.28 201.56,5948.28 242.86,5989.58 260.01,5989.58 305.92,6035.5 392.72,6035.5 435,5993.22 U5.24@435,5950
  MidLayer1 w10: pad.29@111,862.68 149.7,896.2 149.97,896.44 153.15,899.62 153.15,905.38 108.7,1038.98 107.96,1041.2 cw(c116.1,1047) 107.75,1041.5 106.38,1043.58 ccw(c96.81,1040.7) 105.64,1045.38 105.58,1051.05 105.58,1051.4 105.57,1051.48 105.57,1052.26 101.26,1479.89 101.24,1481 101.17,1481.07 101.17,1495.59 101.71,1496.12 101.9,1498.59 ccw(c91.93,1499.41) 101.91,1498.68 117.37,1698.86 117.37,1702.22 116.66,1702.93 116.66,1724.68 126,1734.01 126,1762.37 157.63,1794 185.99,1794 227.26,1835.27 399.29,4237.21 399.29,5152.39 114,5437.67 114,5781.14 134,5801.14 pad.29@134,5812
MID: R17.1 R18.1 U13.6 | length 419.7
  BottomLayer w10: R18.1@821,9205 R17.1@910,9205 940,9235 1032,9235 1054,9213 1054,9092 U13.6@1011,9082
MISO2: pad.48 U4.2 U5.5 U6.2 U7.2 U9.2 | length 2123.2
  TopLayer w10: pad.48@114,6378 48.46,6450.61 48,6483.96 48,6799.04 54.19,6848.29 108.03,6902.12 108.03,6918.43 125,6935.4 125,7066.2 111.25,7079.94 86.06,7079.94 72,7094 72,7140 202,7270 229.87,7270 267,7232.87 267,7229.5 267,7276 v1(272,7281) ; U5.5@223.31,6240.43 287.57,6240.43 346.61,6181.39 v1(377.89,6181.39)
  BottomLayer w10: pad.48@114,6378 123.57,6368.43 143.57,6368.43 325.83,6186.17 373.11,6186.17 v1(377.89,6181.39) ; v1(272,7281) 272,7274 v1(484,7274) ; v1@484,7272 v1(689,7272)
  other v1: 915.1,7272.14
MOSI2: pad.49 U4.5 U5.6 U6.5 U7.5 U9.5 | length 3208.4
  TopLayer w10: v1(151,6872) 145,6872 65,6792 65,6491 67.93,6488.07 pad.49@113,6457 117,6457 164,6410 164,6242.61 185.86,6220.75 U5.6@223.31,6220.75 ; U7.5@369,7486 369,7439 295,7439 291,7443 291,7557 300,7566 997,7566 1014,7549 U6.5@1014,7486 1014,7456.5 v1(1015.5,7455)
  MidLayer1 w10: v1(369.02,7501.09) v1@369.52,7500.59 ; v1@799.52,7500.59 v1(800.02,7500.09)
  BottomLayer w10: v1(151,6872) 121.11,6901.89 108.11,6901.89 79,6931 79,7442 139,7502 368.1,7502 v1(369.02,7501.09) ; v1@369.52,7500.59 v1@799.52,7500.59
  other v1: 583.02,7501.09
NetC38_2: C38.2 R44.2 U18.2 | length 353.8
  TopLayer w10: U18.2@797.25,4305 803.25,4299 U18.2@822,4299 ; C38.2@890,4180 917,4180 962,4225 R44.2@990,4225
  TopLayer w25: U18.2@797.25,4305 815,4305 872.5,4247.5 872.5,4238.5 895,4216 R44.2@963,4216
NetC39_1: C39.1 R47.2
NetC39_2: C39.2 D12.K L1.1 Q20.5 Q20.6 Q20.7 Q20.8
NetC40_1: C40.1 R46.2
NetC40_2: C40.2 C42.2 U18.3
NetC47_2: C47.2 R48.1
NetC60_2: C60.2 R54.2 U19.2 | length 257.1
  TopLayer w10: C60.2@910,2680 910,2695 910,2700
  TopLayer w15: U19.2@777.25,2815 795,2815 798.5,2811.5 798.5,2809.5 885.5,2722.5 887.5,2722.5 909,2701 909,2695 960,2695
NetC61_1: C61.1 R57.2
NetC61_2: C61.2 D13.K L2.1 Q21.5 Q21.6 Q21.7 Q21.8
NetC62_1: C62.1 R56.2
NetC62_2: C62.2 C64.2 U19.3
NetC69_2: C69.2 R58.1
NetC82_2: C82.2 R64.2 U20.2 | length 297.9
  TopLayer w10: U20.2@757.25,1355 770,1355 788,1355 815,1328 815,1293 ; C82.2@900,1250 885,1250 885,1277 877,1285 ; C82.2@901,1240 C82.2@911,1240 ; 815,1293 869,1293 877,1285 ; 815,1293 823,1285 877,1285
NetC83_1: C83.1 R67.2
NetC83_2: C83.2 D14.K L3.1 Q22.5 Q22.6 Q22.7 Q22.8
NetC84_1: C84.1 R66.2
NetC84_2: C84.2 C86.2 U20.3
NetC91_2: C91.2 R68.1
NetD3_2: D3.2 RA1.7 | length 301.6
  TopLayer w10: RA1.7@667.5,7047.99 667.5,7055.87 672.34,7060.71 693.71,7060.71 720,7087 855,7087 D3.2@921,7021
NetD4_2: D4.2 RA1.5 | length 133.4
  TopLayer w10: RA1.5@636,7047.99 636,7024 644,7016 695,7016 700,7021 D4.2@740,7021
NetD5_2: D5.2 RA1.3 | length 138.5
  TopLayer w10: D5.2@498,7025 498,7018 596,7018 604.5,7026.5 RA1.3@604.5,7047.99
NetD6_2: D6.2 RA1.1 | length 951.8
  TopLayer w10: D6.2@323,7025 323,6982.44 430.44,6875 574.03,6875 595.16,6896.13 v1(598.87,6896.13) ; RA1.1@573.01,7047.99 573.01,7055.87 582.66,7065.52 582.66,7070.68 591.98,7080 678,7080 710.22,7112.22 713.2,7112.22 718.99,7118 v1(781,7118)
  BottomLayer w10: v1(598.87,6896.13) 601.13,6896.13 649,6944 649,7049 718,7118 v1(781,7118)
NetF1_1: F1.1 Q3.2
NetF2_1: F2.1 Q8.2 | length 207.9
  TopLayer w10: Q8.2@300.09,8359.91 Q8.2@353,8307
  TopLayer w40: F2.1@167,8359.91 Q8.2@300.09,8359.91
NetF3_1: F3.1 Q10.2 | length 207.3
  TopLayer w10: F3.1@157,7762.91 237,7762.91 269.15,7730.76 Q10.2@350.97,7730.76
NetQ1_3: Q1.3 RA1.6 | length 895.3
  TopLayer w10: v1(636,6876.5) RA1.6@636,6985
  BottomLayer w10: v1(636,6876.5) 636,6731.94 753.39,6614.56 795.14,6614.56 801,6620.41 801,6976.92 777,7000.92 Q1.3@777,7036.71
NetQ1_6: Q1.6 RA1.8 | length 273.8
  TopLayer w10: RA1.8@667.5,6985 667.5,6940.18 656.82,6929.5 656.82,6897.4 665.5,6888.72 665.5,6888.52 685.62,6868.4 696.66,6868.4 v1(701.45,6863.62)
  BottomLayer w10: v1(701.45,6863.62) 702.78,6862.28 721.75,6862.28 734,6874.53 734,6929.86 731.53,6932.33 731.53,6939.46 725.82,6945.17 Q1.6@725.82,6956
NetQ2_3: Q2.3 RA1.4 | length 319.3
  TopLayer w10: v1(455,6931) 494,6892 543.7,6892 604.5,6952.8 RA1.4@604.5,6985
  BottomLayer w10: v1(455,6931) 455,6937.76 471.87,6954.63 Q2.3@471.87,7020.29
NetQ2_6: Q2.6 RA1.2 | length 229.8
  TopLayer w10: v1(531,6948.01) 543.17,6973.03 544.67,6976.12 547.48,6978.93 566.49,6985.5 568.17,6985.5 RA1.2@573.01,6985
  BottomLayer w10: Q2.6@523.05,7101 525.92,7098.13 525.92,7083.08 545,7064 545,6998.7 531,6984.7 v1(531,6948.01)
NetQ4_2: Q4.2 Q5.2 R3.2 | length 341.3
  TopLayer w10: R3.2@784,9472.68 796.72,9485.39 808.45,9485.39 851.99,9528.93 Q5.2@851.99,9532.8 ; Q5.2@854.35,9532.8 845.63,9541.52 820.48,9541.52 786,9576 786,9636.14 792.86,9643 819.68,9643 858.8,9682.13 Q4.2@858.8,9690
NetQ7_4: Q7.4 Q7.5 | length 25.6
  TopLayer w10: Q7.5@854,9410 Q7.4@854,9435.59
NetQ13_1: Q13.1 Q13.2 | length 25.6
  BottomLayer w10: Q13.1@728,8731.71 Q13.2@753.59,8731.71
NetQ17_1: Q17.1 Q18.6 R32.2 | length 368.5
  BottomLayer w10: Q17.1@667.4,633.39 667.4,625.51 702.91,590.01 702.91,573.24 722.68,553.47 722.68,399.41 730.37,391.72 733.01,391.72 740.7,384.03 740.7,332.75 733.67,325.72 726.54,325.72 720.83,320 Q18.6@710,320
NetQ18_4: Q18.4 Q18.5 | length 25.6
  BottomLayer w10: Q18.5@710,345.59 Q18.4@710,371.18
NetQ19_4: Q19.4 Q19.5 | length 25.6
  TopLayer w10: Q19.5@464.41,690 Q19.4@490,690
NetQ19_6: Q19.6 R35.2 | length 81.6
  TopLayer w10: R35.2@437,762 437,706.23 442.41,700.83 Q19.6@442.41,690 ; R35.2@438.82,763.82 R35.2@444,769
NetQ20_1: Q20.1 Q20.2 Q20.3 R43.2 Rs1.1
NetQ21_1: Q21.1 Q21.2 Q21.3 R53.2 Rs2.1
NetQ22_1: Q22.1 Q22.2 Q22.3 R63.2 Rs3.1
NetR39_2: R39.2 U17.4 | length 103.7
  TopLayer w10: U17.4@687.4,779.41 745.39,779.41 772.13,752.68 R39.2@780,752.68
NetR49_2: R49.2 R50.2
NetR59_2: R59.2 R60.2
NetR69_2: R69.2 R70.2
NetTP1_1: TP1.1 U5.45 | length 371.6
  TopLayer w10: U5.45@666.38,6260.12 666.69,6260.43 700.47,6260.43 736.29,6296.25 736.29,6330.31 763.98,6358 831.96,6358 866.13,6392.17 904.17,6392.17 TP1.1@946,6434
OVERCURRENT: U5.53 U13.7 | length 3461.6
  TopLayer w10: U5.53@513.74,6393.07 513.74,6460 488,6485.74 488,6648 556,6716 840.06,6716 901.06,6655 1075,6655 v1(1150,6730)
  BottomLayer w10: U13.7@1011,9032 1003,9024 983.86,9024 932,8972.14 932,8759.11 992.5,8698.61 992.5,8454.5 1043.87,8403.13 1043.87,7742.85 1166,7620.73 1166,6770.61 1154.78,6759.39 1154.78,6734.78 v1(1150,6730)
P: pad.34 Q16.4 R26.2 U5.8 | length 6364
  TopLayer w10: U5.8@223.31,6181.38 223.62,6181.06 283.94,6181.06 v1(285,6180)
  BottomLayer w10: v1(285,6180) 371.07,6093.93 374,6091 374,6056.5 362.04,6044.54 362.04,6033.76 351,6022.72 351,5532 408,5475 408,5325.39 441.39,5292 447.03,5292 448.03,5291 480.14,5291 486,5285.14 486,5213.82 488.93,5210.89 641.66,5058.15 641.66,4800.9 767,4675.57 767,963 pad.34@888,858 808,850 737.19,779.19 737.19,732.53 741.5,728.22 741.5,665.05 719.91,643.45 719.91,580.28 739.68,560.51 739.68,483.28 752.39,470.56 752.39,430.86 758.25,425 R26.2@789.8,425 ; Q16.4@764.41,370 764.41,399.61 R26.2@789.8,425 ; R26.2@810,437.32 802.13,437.32 R26.2@789.8,425
PGC: J1.3 U5.17 | length 336.9
  TopLayer w10: v1(253,5958) 296.89,5958 297.21,5957.68 U5.17@297.21,5950
  MidLayer1 w10: J1.3@33,6102 35,6102 181.75,5955.25 221.19,5955.25 227.5,5961.56 249.44,5961.56 v1(253,5958)
PGD: J1.2 U5.18 | length 502.5
  TopLayer w10: v1(192.08,5908.07) 196.87,5912.86 223.63,5912.86 227.78,5917 235.5,5917 240.5,5912 306.18,5912 316.58,5922.4 316.58,5949.68 U5.18@316.89,5950
  BottomLayer w10: J1.2@33,6152 33.75,6151.25 61.75,6151.25 209,6004 209,5967.38 203,5961.38 203,5945.57 196.87,5939.44 196.87,5912.86 v1(192.08,5908.07)
PHASE-1: pad.52 R2.2 R4.2 U5.12 | length 3360.3
  TopLayer w10: U5.12@223.31,6102.64 223.62,6102.95 256.02,6102.95 265.25,6112.18 v1(272.01,6112.18)
  BottomLayer w10: pad.52@82,6317 126,6317 169,6274 169,6215.2 v1(272.01,6112.18) ; pad.52@82.5,6317.5 45,6355 45,8328 241,8524 241,9120 172,9189 v1(172,9190.5)
PHASE-2: pad.53 R6.2 R7.2 U5.11 | length 2684.8
  TopLayer w10: v1(162,6108) 167.76,6108 181.77,6122.01 222.99,6122.01 U5.11@223.31,6122.32 ; R7.2@164,8531.68 166,8533.68 v1(166,8565)
  BottomLayer w10: pad.53@89.5,6238.5 28,6300 28,8441 109.02,8522.02 123.02,8522.02 v1(166,8565) ; pad.53@95,6244 95,6171 158,6108 v1(162,6108)
PHASE-3: pad.50@148,7298 R10.2 R13.2 U5.30 | length 2416.5
  TopLayer w10: pad.50@152,7298 54.86,7298 45,7307.86 45,7927.14 50.86,7933 R13.2@157,7933 ; v1(474,6178) 474,6126.53 551.03,6049.5 574.22,6049.5 592,6031.72 592,6007.28 574.72,5990 558.97,5990 553.11,5984.14 U5.30@553.11,5950
  BottomLayer w10: pad.50@148,7298 148,7229 185,7192 185,7190 206,7169 206,7001 285,6922 285,6540.28 475,6350.28 475,6179 v1(474,6178)